# Altium PCB DRTC_V1.PcbDoc
Units mil, origin at the board's own origin, x right, y up, seen from the top; angles counter-clockwise.
Board outline 1811.02 x 3176.22 mil, 2 copper layers (Top Layer, Bottom Layer); 17 components, 36 nets, 120 pads, 10 vias.
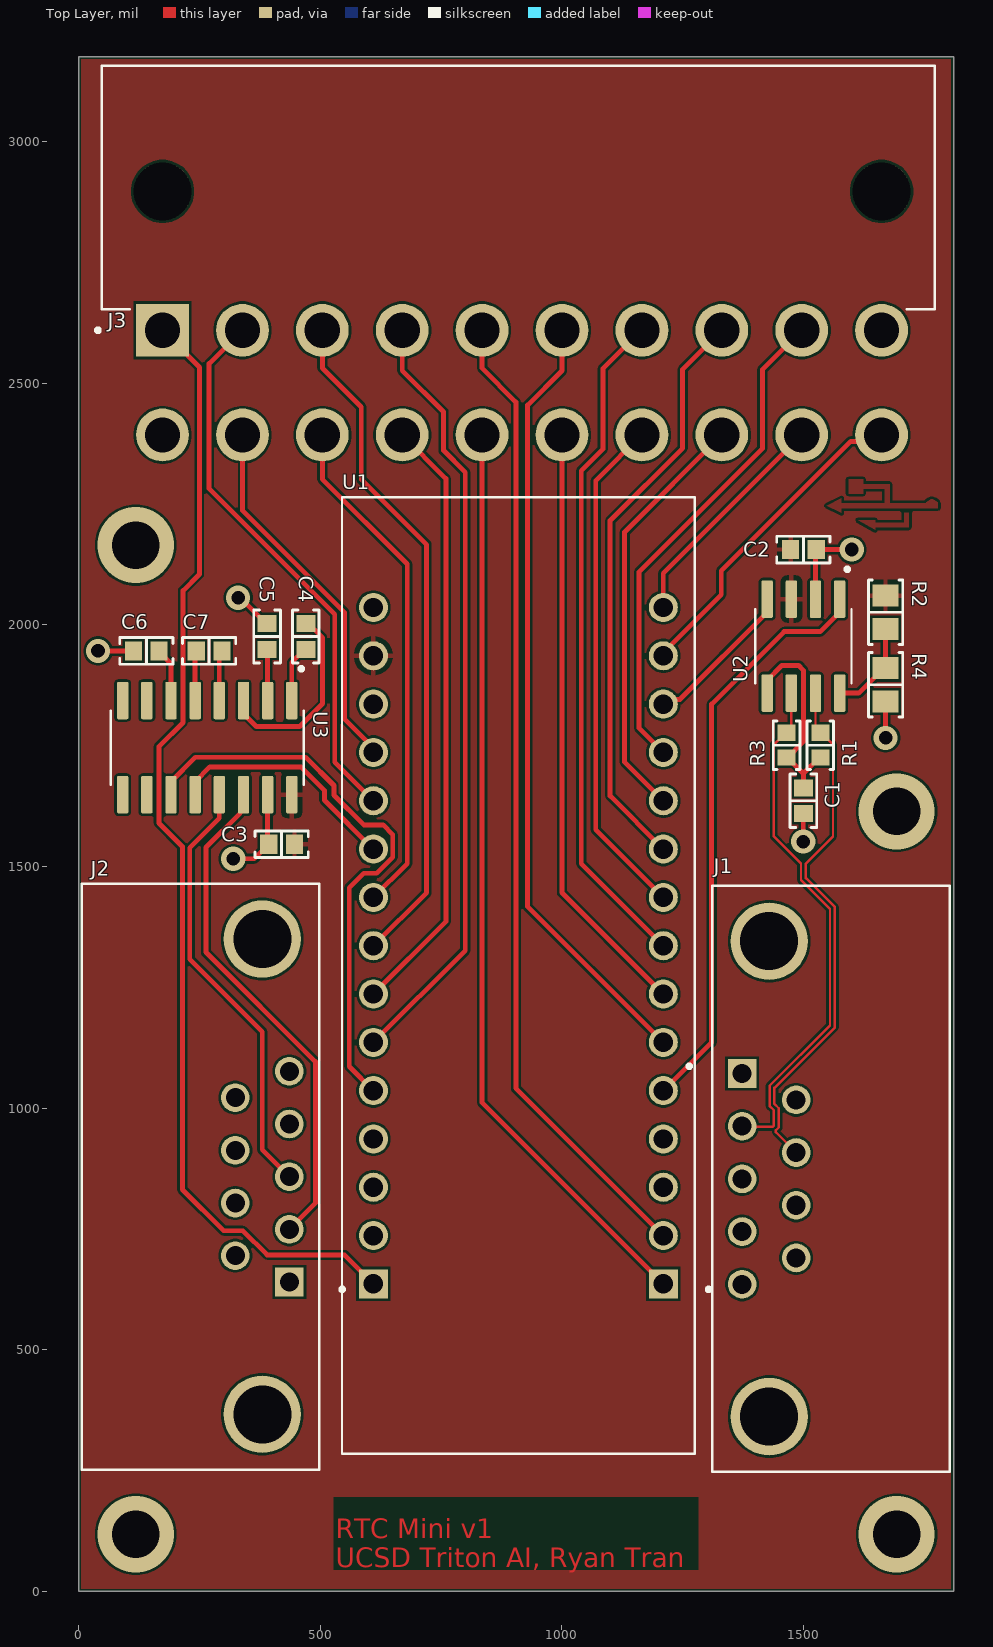
[diagram p0: Top Layer view]
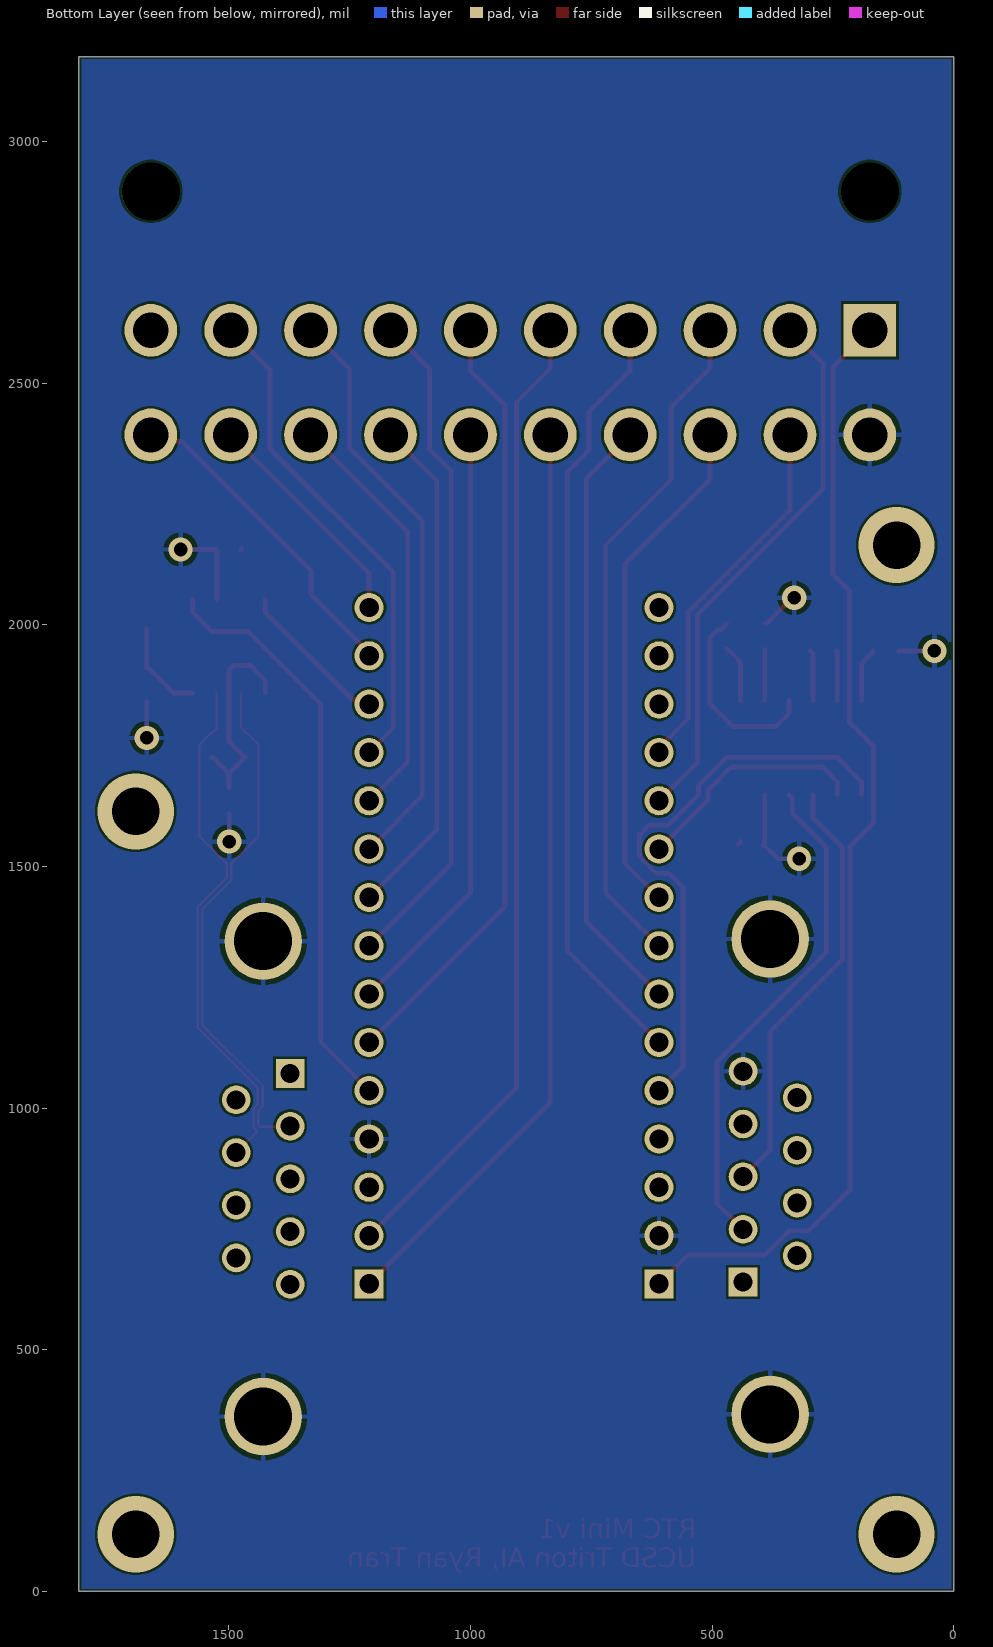
[diagram p1: Bottom Layer view, seen from below]
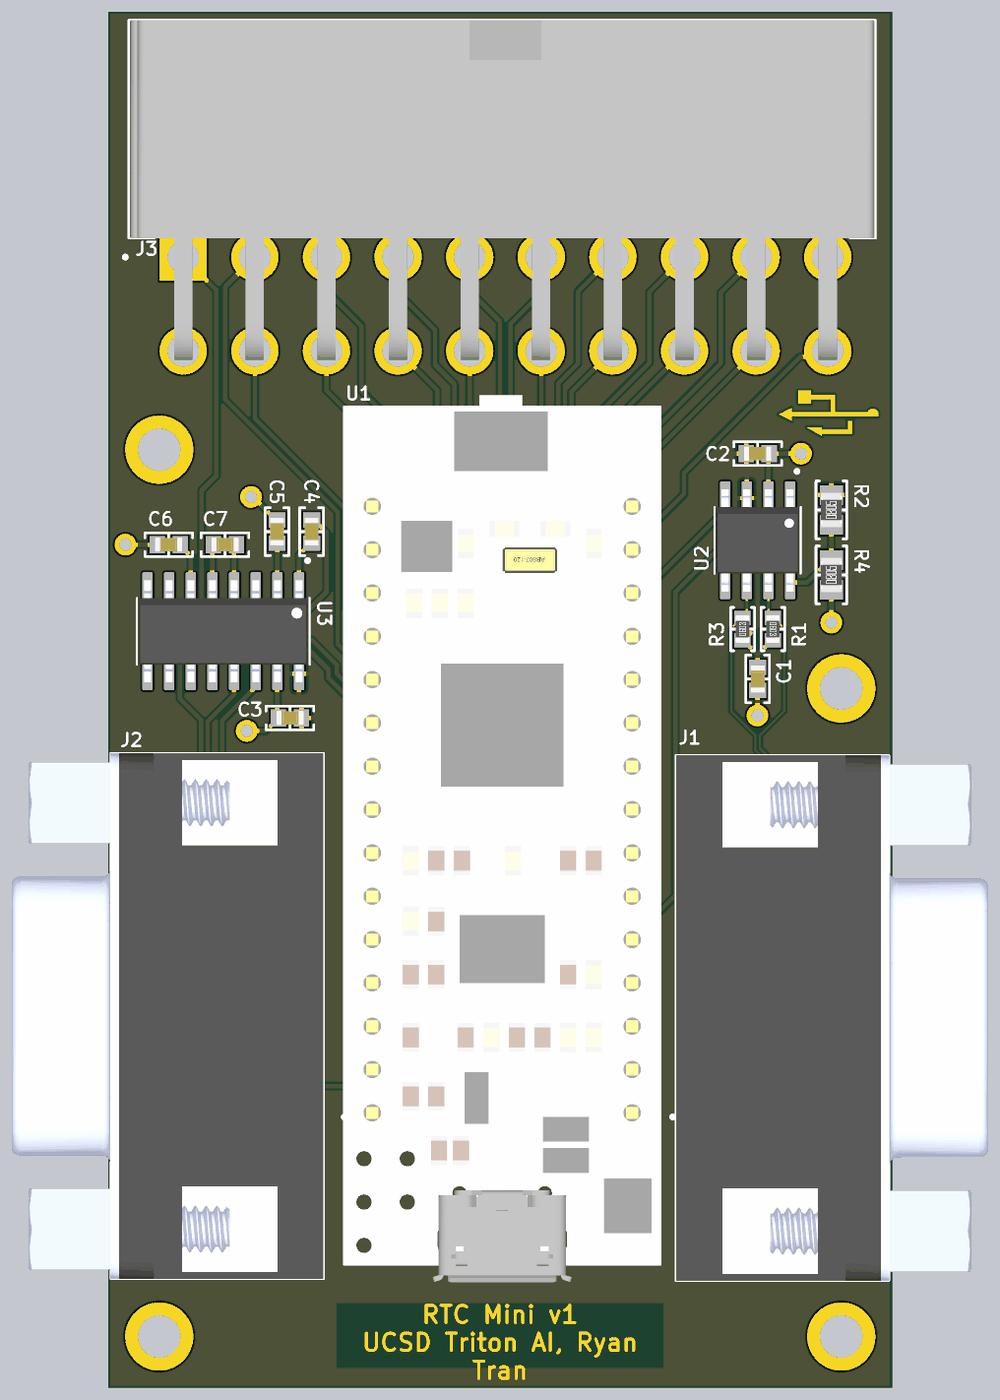
[diagram p2: 3D render of the assembled board from above, using the file's embedded part models]

## Layer stack, top to bottom
Top Solder: solder mask 0.4, Solder Resist, Dk 3.5
Top Layer: signal copper 1.4
Dielectric 1: dielectric 12.6, FR-4, Dk 4.5
Bottom Layer: signal copper 1.4
Bottom Solder: solder mask 0.4, Solder Resist, Dk 3.5

## Board outline
0,0 1811.02,0 1811.02,3176.22 0,3176.22

## Design rules (kind name [scope] priority, off if disabled: settings)
Clearance [All] p1: gap=5 ignorepadtopadclearanceinfootprint=FALSE
DiffPairsRouting DiffPair_DIFF120DiffPairsRouting [InDifferentialPairClass('DIFF120')] p1: maxlimit=5 minlimit=5 mostfreqgap=5 toplayer_minwidth=5 toplayer_maxwidth=5 toplayer_prefwidth=5 bottomlayer_minwidth=5 bottomlayer_maxwidth=5 bottomlayer_prefwidth=5 maxuncoupledlength=500
DiffPairsRouting [All] p2: maxlimit=10 minlimit=5 mostfreqgap=10 toplayer_minwidth=5 toplayer_maxwidth=15 toplayer_prefwidth=15 bottomlayer_minwidth=5 bottomlayer_maxwidth=15 bottomlayer_prefwidth=15 maxuncoupledlength=500
MatchedLengths DiffPair_DIFF120MatchedLengths [InDifferentialPairClass('DIFF120')] p1: tolerance=1000 checknetsindiffpair=FALSE checkdiffpairvsdiffpair=TRUE checkxsignals=TRUE checkothers=TRUE
PolygonConnect [All] p1: connectstyle=Relief reliefconductorwidth=10 reliefentries=4 polygonreliefangle="90 Angle" airgapwidth=10
RoutingVias [All] p1: holewidth=28 width=50 viastyle="Through Hole" minholewidth=28 minwidth=50 maxholewidth=28 maxwidth=50
SolderMaskExpansion [All] p1: expansion=4 istentingtop=FALSE
Width [All] p1: maxlimit=10 minlimit=10 preferedwidth=10
29 further rules are at their usual default settings.

## Classes and differential pairs
component class MCU: C1 C2 C3 C4 C5 C6 C7 J2 J3 R1 R2 R3 R4 U1 U2 U3
differential pair CAN: +CAN_P -CAN_N

## Components (designator, comment, footprint, x,y, rotation, side; value= is the part's Value field where it differs from the comment)
C1 "4700pF" "CAP 0603_1608" 1500,1636.22 r270 top
C2 "0.1µF" "CAP 0603_1608" 1500,2156.22 r180 top
C3 "0.1µF" "CAP 0603_1608" 420,1546.22 r0 top
C4 "0.1µF" "CAP 0603_1608" 470,1976.22 r270 top
C5 "0.1µF" "CAP 0603_1608" 390,1976.22 r270 top
C6 "0.1µF" "CAP 0603_1608" 140,1946.22 r0 top
C7 "0.1µF" "CAP 0603_1608" 270,1946.22 r0 top
J1 "A-DF_09_A/KG-T2S" ASSMANN_A-DF09A/KG-T2S 1429.09,853.58 r90 top
J2 "A-DF_09_A/KG-T2S" ASSMANN_A-DF09A/KG-T2S 380,858.15 r270 top
J3 "0039301200" MOLEX_0039301200 173.58,2610 r180 top
R1 "60.4 Ohms" "RES 0603_1608" 1535,1751.22 r270 top
R2 "=Value" "RES 0805_2012" 1670,2026.22 r90 top
R3 "60.4 Ohms" "RES 0603_1608" 1465,1751.22 r90 top
R4 "=Value" "RES 0805_2012" 1670,1876.22 r90 top
U1 "NUCLEO-L432KC" MODULE_NUCLEO-L432KC 910,1274.61 r180 top
U2 "SN65HVD230DR" SOIC127P599X175-8N 1500,1956.22 r270 top
U3 "MAX3232IDR" SOIC127P600X175-16N 266.06,1746.22 r270 top

## Footprints (in the part's own frame and the unit in brackets; to place one, negate y for a bottom-side part, rotate by r counter-clockwise, add the part's x,y. Pads: shape width x height; smd on the part's side, far side on the other; paste and mask are expansions set on the pad)
ASSMANN_A-DF09A/KG-T2S [mm]
  rect 1.508x1.508 hole 1: 1(5.54,1.42)
  round 1.508 hole 1: 2(2.77,1.42) 3(0,1.42) 4(-2.77,1.42) 5(-5.54,1.42) 6(4.155,-1.42) 7(1.385,-1.42) 8(-1.385,-1.42) 9(-4.155,-1.42)
  round 4.066 hole 3.05: S1(-12.495,0) S2(12.495,0)
  silkscreen extent -15.41,-9.5 15.41,4.3, body extent -15.41,-15.32 15.41,2.98, height 12.55
"CAP 0603_1608" [mm] "Chip Capacitor, 2-Leads, Body 1.60x0.80mm, IPC Medium Density"
  rect 0.9x1 smd: 1(-0.675,0) 2(0.675,0)
  silkscreen extent -1.4,-0.7 1.4,0.7, body extent -0.8,-0.41 0.8,0.41, height 0.82
MODULE_NUCLEO-L432KC [mm]
  rect 1.53x1.53 hole 1.02: CN3_1(-7.62,16.215) CN4_1(7.62,16.215)
  round 1.53 hole 1.02: CN3_2(-7.62,13.675) CN3_3(-7.62,11.135) CN3_4(-7.62,8.595) CN3_5(-7.62,6.055) CN3_6(-7.62,3.515) CN3_7(-7.62,0.975) CN3_8(-7.62,-1.565) CN3_9(-7.62,-4.105) CN3_10(-7.62,-6.645) CN3_11(-7.62,-9.185) CN3_12(-7.62,-11.725) CN3_13(-7.62,-14.265) CN3_14(-7.62,-16.805) CN3_15(-7.62,-19.345) CN4_2(7.62,13.675) CN4_3(7.62,11.135) CN4_4(7.62,8.595) CN4_5(7.62,6.055) CN4_6(7.62,3.515) CN4_7(7.62,0.975) CN4_8(7.62,-1.565) CN4_9(7.62,-4.105) CN4_10(7.62,-6.645) CN4_11(7.62,-9.185) CN4_12(7.62,-11.725) CN4_13(7.62,-14.265) CN4_14(7.62,-16.805) CN4_15(7.62,-19.345)
  silkscreen extent -10.1,-25.14 9.27,25.14, body extent -9.27,-25.82 9.27,26.19, height 6.26
MOLEX_0039301200 [mm]
  rect 2.775x2.775 hole 1.85: 1(0,0)
  round 2.775 hole 1.85: 2(-4.2,0) 3(-8.4,0) 4(-12.6,0) 5(-16.8,0) 6(-21,0) 7(-25.2,0) 8(-29.4,0) 9(-33.6,0) 10(-37.8,0) 11(0,5.5) 12(-4.2,5.5) 13(-8.4,5.5) 14(-12.6,5.5) 15(-16.8,5.5) 16(-21,5.5) 17(-25.2,5.5) 18(-29.4,5.5) 19(-33.6,5.5) 20(-37.8,5.5)
  round 3 hole 3.05 unplated: ""(-37.8,-7.3) ""(0,-7.3)
  silkscreen extent -40.6,-13.9 3.5,0.1, body extent -40.5,-13.9 3.1,6.03, height 11.4
"RES 0603_1608" [mm] "Chip Resistor, 2-Leads, Body 1.60x0.80mm, IPC Medium Density"
  rect 0.85x0.95 smd: 1(-0.65,0) 2(0.65,0)
  silkscreen extent -1.27,-0.7 1.27,0.7, body extent -0.8,-0.4 0.8,0.4, height 0.45
"RES 0805_2012" [mm] "Chip Resistor, 2-Leads, Body 2.00x1.25mm, IPC Medium Density"
  rect 1.15x1.35 smd: 1(-0.875,0) 2(0.875,0)
  silkscreen extent -1.7,-0.9 1.7,0.9, body extent -1,-0.62 1,0.63, height 0.6
SOIC127P599X175-8N [mm]
  rrect25% 1.97x0.6 smd: 1(-2.47,1.905) 2(-2.47,0.635) 3(-2.47,-0.635) 4(-2.47,-1.905) 5(2.47,-1.905) 6(2.47,-0.635) 7(2.47,0.635) 8(2.47,1.905)
  silkscreen extent -4.14,-2.52 1.95,2.52, body extent -3,-2.45 3,2.45, height 1.75
SOIC127P600X175-16N [mm]
  rrect25% 1.97x0.6 smd: 1(-2.475,4.445) 2(-2.475,3.175) 3(-2.475,1.905) 4(-2.475,0.635) 5(-2.475,-0.635) 6(-2.475,-1.905) 7(-2.475,-3.175) 8(-2.475,-4.445) 9(2.475,-4.445) 10(2.475,-3.175) 11(2.475,-1.905) 12(2.475,-0.635) 13(2.475,0.635) 14(2.475,1.905) 15(2.475,3.175) 16(2.475,4.445)
  silkscreen extent -4.24,-5.06 1.95,5.06, body extent -3,-4.95 3,4.95, height 1.75

## Part data
C1: library part CGA3E2X7R1H472K080AA, "CAP CER 4700PF 50V X7R 0603", Device Package="0603 (1608 Metric)", Manufacturer="TDK Corporation", Operating Temperature="-55°C ~ 125°C", Ratings=AEC-Q200, Supplier Part Number 1=445-5661-1-ND, Temperature Coefficient=X7R, Tolerance=±10%, Voltage - Rated=50V, Applications=Automotive, Capacitance=4700pF, ComponentLink1Description=Datasheet, ComponentLink1URL=https://product.tdk.com/info/en/catalog/datasheets/mlcc_automotive_general_en.pdf?ref_disty=digikey, ComponentLink2Description="DigiKey Link", ComponentLink2URL=http://digikey.com/product-detail/en/tdk-corporation/CGA3E2X7R1H472K080AA/445-5661-1-ND/2443701, LastUpdated="9/2/2020 1:03:30 AM", Lifecycle Status=Active, Minimum Order=1, Mounting Type="Surface Mount, MLCC", Package / Case="0603 (1608 Metric)", Packaging=TapeAndReel, Part Number=CGA3E2X7R1H472K080AA, Part Status=Active, PartId=5842, Price=0.01, Series=CGA, Size / Dimension="0.063\" L x 0.031\" W (1.60mm x 0.80mm)", Supplier 1=DigiKey, Thickness (Max)="0.035\" (0.90mm)"
C2 C3 C4 C5 C6 C7: library part CL10B104KA8NNNC, "CAP CER 0.1UF 25V X7R 0603", Device Package="0603 (1608 Metric)", Manufacturer="Samsung Electro-Mechanics", Operating Temperature="-55°C ~ 125°C", Supplier Part Number 1=1276-1006-1-ND, Temperature Coefficient=X7R, Tolerance=±10%, Voltage - Rated=25V, Applications="General Purpose", Capacitance=0.1µF, ComponentLink1Description=Datasheet, ComponentLink1URL=http://www.samsungsem.com/kr/support/product-search/mlcc/CL10B104KA8NNNC.jsp, ComponentLink2Description="DigiKey Link", ComponentLink2URL=http://digikey.com/product-detail/en/samsung-electro-mechanics/CL10B104KA8NNNC/1276-1006-1-ND/3889092, LastUpdated="9/2/2020 1:03:22 AM", Lifecycle Status=Active, Minimum Order=1, Mounting Type="Surface Mount, MLCC", Package / Case="0603 (1608 Metric)", Packaging=TapeAndReel, Part Number=CL10B104KA8NNNC, Part Status=Active, PartId=9793, Price=0.01, Series=CL, Size / Dimension="0.063\" L x 0.031\" W (1.60mm x 0.80mm)", Supplier 1=DigiKey, Thickness (Max)="0.035\" (0.90mm)"
J1 J2: "Conn D-Subminiature F 9 POS 2.77mm Solder RA Thru-Hole 9 Terminal 1 Port", Package=None, Availability=Unavailable, MF="{'manufacturer': u'Assmann WSW'}", MP=A-DF_09_A/KG-T2S, Price=None
J3: "Connector Header Through Hole, Right Angle 20 position 0.165\" (4.20mm)"
R1 R3: library part RMCF0603FT60R4, "RES 60.4 OHM 1% 1/10W 0603", Device Package="0603 (1608 Metric)", Manufacturer="Stackpole Electronics Inc", Operating Temperature="-55°C ~ 155°C", Power (Watts)="0.1W, 1/10W", Ratings=AEC-Q200, Supplier Device Package=0603, Supplier Part Number 1=RMCF0603FT60R4CT-ND, Temperature Coefficient=±100ppm/°C, Tolerance=±1%, ComponentLink1Description=Datasheet, ComponentLink1URL=https://www.seielect.com/catalog/sei-rmcf_rmcp.pdf, ComponentLink2Description="DigiKey Link", ComponentLink2URL=http://digikey.com/product-detail/en/stackpole-electronics-inc/RMCF0603FT60R4/RMCF0603FT60R4CT-ND/2418105, Composition="Thick Film", Features="Automotive AEC-Q200", Height - Seated (Max)="0.022\" (0.55mm)", LastUpdated="9/2/2020 1:10:13 AM", Lifecycle Status=Active, Minimum Order=1, Number of Terminations=2, Package / Case="0603 (1608 Metric)", Packaging=CutTape, Part Number=RMCF0603FT60R4, Part Status=Active, PartId=10803, Price=0.10, Resistance="60.4 Ohms", Series=RMCF, Size / Dimension="0.061\" L x 0.031\" W (1.55mm x 0.80mm)", Supplier 1=DigiKey
R2 R4: library part CRCW08050000Z0EAC, "RES SMD 0 OHM JUMP 1/8W 0805", Device Package="0805 (2012 Metric)", Manufacturer="Vishay Dale", Operating Temperature="-55°C ~ 155°C", Power (Watts)="0.125W, 1/8W", Supplier Device Package=0805, Supplier Part Number 1=541-4125-1-ND, Tolerance=Jumper, ComponentLink1Description=Datasheet, ComponentLink1URL=http://www.vishay.com/docs/28773/crcwce3.pdf, ComponentLink2Description="DigiKey Link", ComponentLink2URL=http://digikey.com/product-detail/en/vishay-dale/CRCW08050000Z0EAC/541-4125-1-ND/7928808, Composition="Thick Film", Height - Seated (Max)="0.024\" (0.60mm)", LastUpdated="9/2/2020 1:15:03 AM", Lifecycle Status=Active, Minimum Order=1, Number of Terminations=2, Package / Case="0805 (2012 Metric)", Packaging=CutTape, Part Number=CRCW08050000Z0EAC, Part Status=Active, PartId=37138, Price=0.10, Series=CRCW-C, Size / Dimension="0.079\" L x 0.049\" W (2.00mm x 1.25mm)", Supplier 1=DigiKey
U1: "STM32 Nucleo-32 development board with STM32L432KC MCU, supports Arduino connectivity", Package=None, Availability=Unavailable, MF="{'manufacturer': u'STMicroelectronics'}", MP=NUCLEO-L432KC, Price=None
U2: "3.3 V CAN Transceiver with Standby Mode 8-SOIC -40 to 85", Package=None, Availability=Unavailable, MF="{'manufacturer': u'Texas Instruments'}", MP=SN65HVD230DR, Price=None
U3: "3-V to 5.5-V multichannel RS-232 line driver & receiver 16-SOIC -40 to 85", Package=None, Availability=Unavailable, MF="{'manufacturer': u'Texas Instruments'}", MP=MAX3232IDR, Price=None

## Via types
v1: diameter 50, hole 28, Top Layer to Bottom Layer, 6 vias
v2: diameter 157.48, hole 98.43, Top Layer to Bottom Layer, 4 vias

## Nets (pads, with @x,y where several pads share a name; then routed paths per layer and width w, separated by ;. In a path a pad name is that pad's centre, name@x,y a point inside that pad or via, vN(x,y) a via of type N, cw(c..) or ccw(c..) an arc to the next point about the centre after c; other vN are vias at no path point)
3V3: C2.2 C3.2 R2.2 U1.CN4_14 U2.3 U3.16 | length 12
  Top Layer w10: C3.2@441.06,1551.73 C3.2 ; C2.2@1473.43,2158.19 C2.2 C2.2@1475,2154.65
A0: J3.12 U1.CN4_12 | length 769.5
  Top Layer w10: J3.12 338.94,2237.28 550,2026.22 550,1806.22 610,1746.22 U1.CN4_12
A1: J3.2 U1.CN4_11 | length 1143.2
  Top Layer w10: J3.2 270,2541.06 270,2281.85 530,2021.85 530,1716.22 U1.CN4_11
A3: J3.13 U1.CN4_9 | length 1059
  Top Layer w10: J3.13 504.29,2301.93 680,2126.22 680,1506.22 U1.CN4_9
A4: J3.3 U1.CN4_8 | length 1408.7
  Top Layer w10: J3.3 504.29,2531.93 585,2451.22 585,2301.22 720,2166.22 720,1446.22 U1.CN4_8
A5: J3.14 U1.CN4_7 | length 1256.8
  Top Layer w10: U1.CN4_7 760,1386.22 760,2303.11 J3.14
A6: J3.4 U1.CN4_6 | length 1606.5
  Top Layer w10: U1.CN4_6 800,1326.22 800,2316.22 755,2361.22 755,2441.22 669.65,2526.57 J3.4
CAN_N: J1.2 R3.2 U2.6 | length 1082.1
  Top Layer w5: J1.2 1374.59,961.23 1436.02,961.23 1438.95,964.16 1438.95,995.72 1430,1004.67 1430,1046.22 1555,1171.22 1555,1412.08 1495,1472.08 1495,1506.22 1438.8,1562.42 1438.8,1752.58 1463.03,1776.81 R3.2 1475,1786.81 U2.6
CAN_P: J1.7 R1.1 U2.7 | length 1090.4
  Top Layer w5: J1.7 1443.09,950.02 1443.09,954.16 1448.95,960.02 1448.95,999.86 1440,1008.81 1440,1042.08 1565,1167.08 1565,1416.22 1505,1476.22 1505,1506.22 1561.2,1562.42 1561.2,1752.58 1536.97,1776.81 R1.1 1525,1786.81 U2.7
CAN_RX: U1.CN3_13 U2.4 | length 320.8
  Top Layer w10: U1.CN3_13 1219.61,1845.83 1244.34,1845.83 1425,2026.5 U2.4
CAN_TX: U1.CN3_5 U2.1 | length 1212.2
  Top Layer w10: U1.CN3_5 1310,1136.22 1310,1836.22 1460,1986.22 1534.72,1986.22 1575,2026.5 U2.1
D0: J3.15 U1.CN3_1 | length 1912.6
  Top Layer w10: J3.15 835,1011.22 U1.CN3_1
D1: J3.5 U1.CN3_2 | length 2029.1
  Top Layer w10: J3.5 835,2531.22 905,2461.22 905,1041.22 U1.CN3_2
D3: J3.6 U1.CN3_6 | length 1619.7
  Top Layer w10: J3.6 1000.35,2526.57 929,2455.22 929,1417.22 U1.CN3_6
D4: J3.16 U1.CN3_7 | length 1244.1
  Top Layer w10: J3.16 1000.35,1445.87 U1.CN3_7
D5: J3.7 U1.CN3_8 | length 1404.6
  Top Layer w10: J3.7@1170.71,2616.22 1085,2530.51 1085,2363.98 1040,2318.98 1040,1506.22 U1.CN3_8
D6: J3.17 U1.CN3_9 | length 1063.2
  Top Layer w10: J3.17@1170.71,2399.69 1070,2298.98 1070,1576.22 U1.CN3_9
D7: J3.8 U1.CN3_10 | length 1215.1
  Top Layer w10: U1.CN3_10 1100,1646.22 1100,2216.22 1250,2366.22 1250,2528.94 J3.8
D8: J3.18 U1.CN3_11 | length 873.7
  Top Layer w10: U1.CN3_11 1130,1716.22 1130,2192.4 J3.18
D9: J3.9 U1.CN3_12 | length 1033.8
  Top Layer w10: U1.CN3_12 1160,1786.22 1160,2110 1415,2365 1415,2528.58 J3.9
D11: J3.20 U1.CN3_14 | length 672.6
  Top Layer w10: U1.CN3_14 1210,1942.91 1330,2062.91 1330,2112 1598,2380 1647.09,2380 J3.20@1660.55,2393.46
D12: J3.19 U1.CN3_15 | length 475.9
  Top Layer w10: U1.CN3_15 1210,2107.05 J3.19
GND: C1.2 C2.1 C3.1 C5.1 C6.1 J1.S1 J1.S2 J2.5 J2.S1 J2.S2 J3.11 R4.1 U1.CN3_4 U1.CN4_2 U2.2 U3.15 | length 656.6
  Top Layer w10: v1(40,1946.22) C6.1 ; v1(320,1516.22) 363.43,1516.22 378.74,1531.54 380.71,1531.54 393.43,1544.25 C3.1 391.06,1548.58 U3.15 ; v1(330,2056.22) 334.61,2056.22 388.03,2002.8 C5.1 ; v1(1499.52,1551.7) 1499.52,1609.16 C1.2 ; U2.2 1525,2154.65 C2.1 v1(1600,2156.22) ; v1(1670,1766.22) R4.1
NetC1_1: C1.1 R1.2 R3.1 U2.5 | length 440.1
  Top Layer w10: U2.5 1425,1885.94 1455.28,1916.22 1490,1916.22 1500,1906.22 1500,1758.66 R3.1@1466.97,1725.63 ; R3.1 R3.1@1466.97,1725.63 ; C1.1 1500,1692.6 ; R1.2 1533.03,1725.63 1500,1692.6 ; R3.1@1466.97,1725.63 1500,1692.6
NetC4_1: C4.1 U3.3 | length 404.5
  Top Layer w10: U3.3 341.06,1816.69 367.87,1789.88 457.36,1789.88 504.69,1837.21 504.69,1973.58 488.18,1990.08 482.72,1990.08 C4.1
NetC4_2: C4.2 U3.1 | length 119.1
  Top Layer w10: U3.1 441.06,1922.68 468.03,1949.65 C4.2
NetC5_2: C5.2 U3.2 | length 106.4
  Top Layer w10: C5.2 391.06,1948.58 U3.2
NetC6_2: C6.2 U3.6 | length 112.7
  Top Layer w10: C6.2 166.57,1944.25 191.06,1919.76 U3.6
NetC7_1: C7.1 U3.5 | length 103.5
  Top Layer w10: U3.5 241.06,1943.86 C7.1
NetC7_2: C7.2 U3.4 | length 104.8
  Top Layer w10: U3.4 291.06,1940.71 C7.2
NetJ2_2: J2.2 U3.14 | length 1048.1
  Top Layer w10: U3.14 334.25,1641.97 334.25,1610.47 263.46,1539.68 263.46,1322.76 490,1096.22 490,803.19 J2.2
NetJ2_3: J2.3 U3.13 | length 901.2
  Top Layer w10: U3.13 291.06,1600.1 230,1539.03 230,1308.22 380,1158.22 380,914.06 J2.3
NetR2_1: R2.1 R4.2 U2.8 | length 197.5
  Top Layer w10: U2.8 1614.37,1858.98 1666.06,1910.67 R4.2 R2.1
RS232_RX: U1.CN4_10 U3.12 | length 490.7
  Top Layer w10: U3.12 241.06,1675.75 271.54,1706.22 460,1706.22 508.48,1657.74 508.48,1637.74 U1.CN4_10
RS232_TX: U1.CN4_5 U3.11 | length 1188.6
  Top Layer w10: U3.11 191.06,1675.75 241.54,1726.22 470,1726.22 528.48,1667.74 528.48,1647.74 590,1586.22 630,1586.22 650.12,1566.1 650.12,1519.6 616.74,1486.22 590,1486.22 560,1456.22 560,1086.22 U1.CN4_5
VCC: J3.1 U1.CN4_1 | length 2341.5
  Top Layer w10: J3.1 250,2533.58 250,2105.22 216,2071.22 216,1970.34 215.71,1970.05 215.71,1922.39 216,1922.1 216,1798.22 166,1748.22 166,1590.22 214.63,1541.59 214.63,831.59 300,746.22 340,746.22 390,696.22 550,696.22 U1.CN4_1
pads on no net: J1.1 J1.3 J1.4 J1.5 J1.6 J1.8 J1.9 J2.1 J2.4 J2.6 J2.7 J2.8 J2.9 J3. J3.10 U1.CN3_3 U1.CN4_3 U1.CN4_4 U1.CN4_13 U1.CN4_15 U3.7 U3.8 U3.9 U3.10
copper on no net:
  other v2: 118.11,118.11 1692.91,118.11 1692.91,1614.17 118.11,2165.35

## Polygon pours and split planes (outlines as drawn)
no net on Top Layer "NONET_L01_P004" (solid, pour order 4): 1778.41,2251.8 ccw(c1765.91,2245.92) 1753.41,2251.8 1678.41,2251.8 1678.41,2291.8 1623.41,2291.8 1623.41,2301.8 1593.41,2301.8 1593.41,2271.8 1623.41,2271.8 1623.41,2281.8 1668.41,2281.8 1668.41,2251.8 1578.41,2251.8 1578.41,2261.8 1548.41,2246.8 1578.41,2231.8 1578.41,2241.8 1778.41,2241.8
no net on Top Layer "NONET_L01_P005" (solid, pour order 5): 1718.41,2231.8 1708.41,2231.8 1708.41,2211.8 1648.41,2211.8 1648.41,2216.8 1613.41,2216.8 1648.41,2196.8 1648.41,2201.8 1718.41,2201.8
3V3 on Top Layer "3V3_L01_P001" (solid, pour order 1): 5,3171.22 5,5 1805,5 1805,3171.22
no net on Top Solder "NONET_L01_P008" (solid, pour order 8): 1778.41,2251.8 ccw(c1765.91,2245.92) 1753.41,2251.8 1678.41,2251.8 1678.41,2291.8 1623.41,2291.8 1623.41,2301.8 1593.41,2301.8 1593.41,2271.8 1623.41,2271.8 1623.41,2281.8 1668.41,2281.8 1668.41,2251.8 1578.41,2251.8 1578.41,2261.8 1548.41,2246.8 1578.41,2231.8 1578.41,2241.8 1778.41,2241.8
no net on Top Solder "NONET_L01_P009" (solid, pour order 9): 1718.41,2231.8 1708.41,2231.8 1708.41,2211.8 1648.41,2211.8 1648.41,2216.8 1613.41,2216.8 1648.41,2196.8 1648.41,2201.8 1718.41,2201.8
GND on Bottom Layer "GND_L02_P000" (solid, pour order 0): 5,3171.22 5,5 1805,5 1805,3171.22

## Other copper
Top Layer:
  text "RTC Mini v1 / UCSD Triton AI, Ryan Tran" at 532.5,50 h40

## Silkscreen, mask and mechanical layers (free items; w line width, h text height)
Top Solder:
  text "RTC Mini v1 / UCSD Triton AI, Ryan Tran" at 532.5,50 h40